# EAGLE board xr_vco_components_initial (EAGLE 7.3.0)
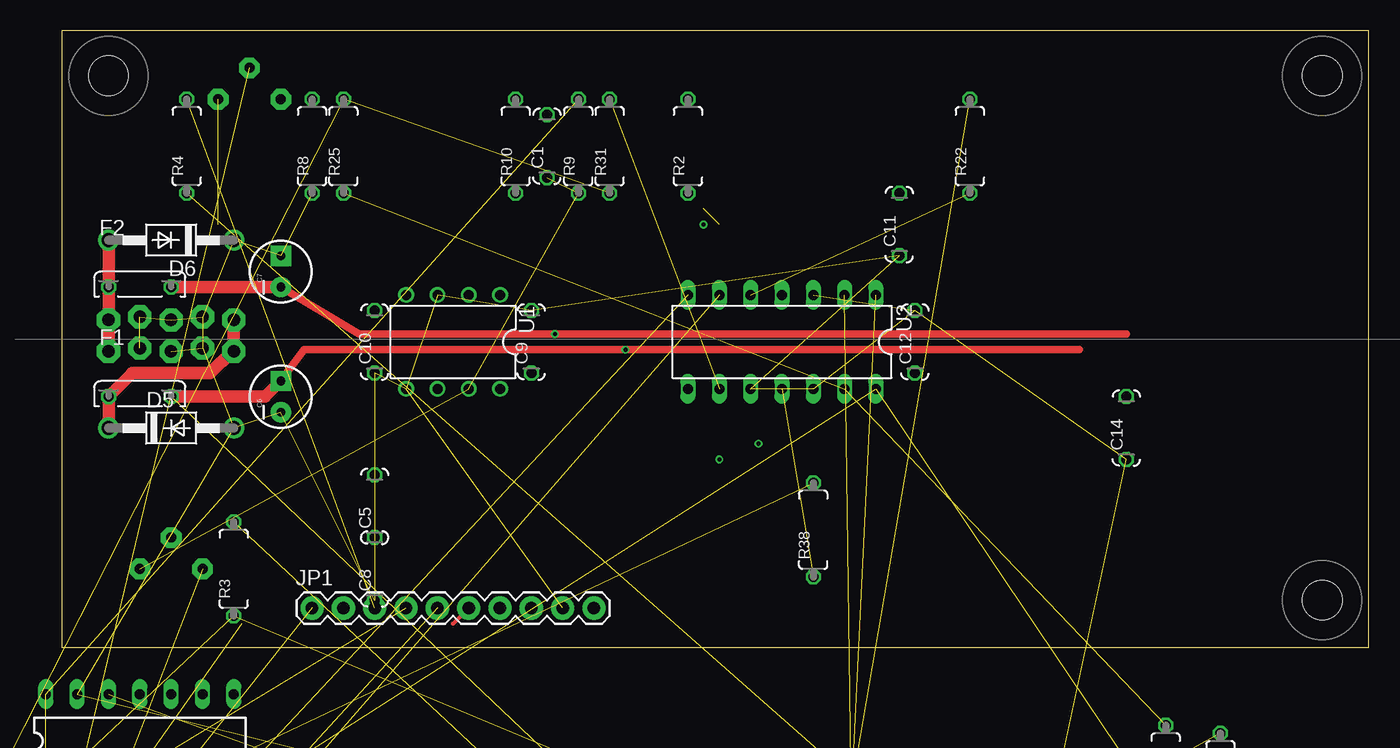
[diagram p0: board, top side]
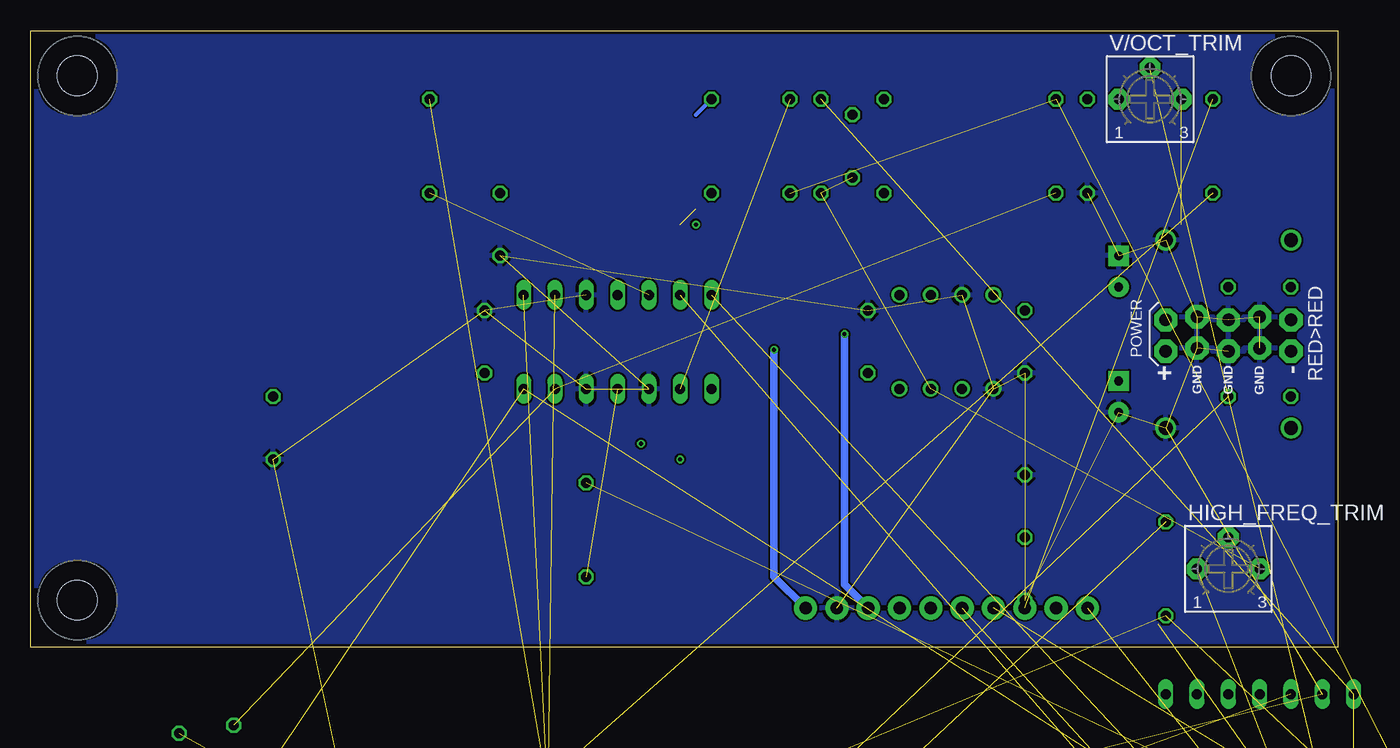
[diagram p1: board, bottom side, seen from below]

Size 106 x 50 mm. Coordinates in mm from the lower left corner, seen from the top.
Outline: 0,0 106,0 106,50 0,50 0,0
Copper layers (1*2*15*16): Top 0.035mm / dielectric 0.2mm / Route2 0.0175mm / dielectric 1.1mm / Route15 0.0175mm / dielectric 0.2mm / Bottom 0.035mm
Design rules "SeeedStudio_DRU_no_angle_20130527": minimum track width 6mil, minimum drill 12mil, track to track 6mil, track to pad 6mil, pad to pad 6mil, via to via 6mil, smd to smd 0mil, copper to edge 10mil, drill to drill 10mil, minimum pad ring 6mil, minimum via ring 6mil, stop-mask expansion 2mil, vias tented up to drill 25mil, thermal gap 10mil
Net classes: 1 power: width 0.406 mm; 2 ground: width 0.305 mm

## Footprints (pad centres in the part's own frame; a part is rotated, then mirrored left to right if it is on the bottom)
C050-024X044 = drill 0.813 octagon: 1 -2.54,0; 2 2.54,0
CPOL-RADIAL-10UF-25V = drill 0.7 pad 1.651 square: 1 1.27,0 | drill 0.7 pad 1.651: 2 -1.27,0
DO35-7 = drill 0.813: A 3.81,0 | drill 0.813 square: C -3.81,0
DO41-10 = drill 1.118: A 5.08,0; C -5.08,0
C050H075X075 = drill 0.813 octagon: 1 -2.54,0; 2 2.54,0
BOURNS_3362P_TRIMMER = drill 0.813 pad 1.676 octagon: 1 -2.54,0; 2 0,2.54; 3 2.54,0
DIL16 = drill 0.813 long: 1 -8.89,-3.81; 2 -6.35,-3.81; 3 -3.81,-3.81; 4 -1.27,-3.81; 5 1.27,-3.81; 6 3.81,-3.81; 7 6.35,-3.81; 8 8.89,-3.81; 9 8.89,3.81; 10 6.35,3.81; 11 3.81,3.81; 12 1.27,3.81; 13 -1.27,3.81; 14 -3.81,3.81; 15 -6.35,3.81; 16 -8.89,3.81
1X10 = drill 1.016 pad 1.88: 1 0,0; 2 2.54,0; 3 5.08,0; 4 7.62,0; 5 10.16,0; 6 12.7,0; 7 15.24,0; 8 17.78,0; 9 20.32,0; 10 22.86,0
DIL14 = drill 0.813 long: 1 -7.62,-3.81; 2 -5.08,-3.81; 3 -2.54,-3.81; 4 0,-3.81; 5 2.54,-3.81; 6 5.08,-3.81; 7 7.62,-3.81; 8 7.62,3.81; 9 5.08,3.81; 10 2.54,3.81; 11 0,3.81; 12 -2.54,3.81; 13 -5.08,3.81; 14 -7.62,3.81
TO92D = drill 0.813 octagon: B 0,1.905; C 1.27,0; E -1.27,0
7MM_RESISTOR = drill 0.813 octagon: 1 -3.81,0; 2 3.81,0
108-2AD1T2224-EVX = drill 1.092 square: 1 -1.27,-2.54; 2 -1.27,0; 3 -1.27,2.54; 4 1.27,-2.54; 5 1.27,0; 6 1.27,2.54
EURO_PWR_HEADER_LOCK = drill 1.016 pad 1.88 octagon: GND1 -2.54,1.143; GND2 -2.54,-1.397; GND3 0,1.397; GND4 0,-1.143; GND5 2.54,1.143; GND6 2.54,-1.397; NEG1 -5.08,1.397; NEG2 -5.08,-1.143; POS1 5.08,1.397; POS2 5.08,-1.143
DIL08 = drill 0.813 pad 1.27: 1 -3.81,-3.81; 2 -1.27,-3.81; 3 1.27,-3.81; 4 3.81,-3.81; 5 3.81,3.81; 6 1.27,3.81; 7 -1.27,3.81; 8 -3.81,3.81
MOUNTING_HOLE = hole 3.2: 0,0

## Placement (x,y rotation side)
C1  100pf  [C050-024X044]  39.37,40.64 90 top
C2  10uf  [CPOL-RADIAL-10UF-25V]  -25.4,-39.37 0 top  (outside the outline)
C5  100n  [C050-024X044]  25.4,11.43 90 top
C6  10uf  [CPOL-RADIAL-10UF-25V]  17.78,20.32 90 top
C7  10uf  [CPOL-RADIAL-10UF-25V]  17.78,30.48 90 top
C8  100n  [C050-024X044]  25.4,6.35 90 top
C9  100n  [C050-024X044]  38.1,24.77 90 top
C10  100n  [C050-024X044]  25.4,24.77 90 top
C11  100n  [C050-024X044]  67.94,34.29 90 top
C12  100n  [C050-024X044]  69.22,24.77 90 top
C13  100n  [C050-024X044]  74.93,-13.97 90 top  (outside the outline)
C14  100n  [C050-024X044]  86.36,17.78 90 top
C15  470pf  [C050-024X044]  -40.64,-80.01 0 top  (outside the outline)
C16  0.047uf  [C050-024X044]  -40.64,-87 0 top  (outside the outline)
C17  4.7uf  [CPOL-RADIAL-10UF-25V]  -47.62,-83.82 0 top  (outside the outline)
C18  4.7uf  [CPOL-RADIAL-10UF-25V]  -53.34,-83.82 0 top  (outside the outline)
D1  1N4148  [DO35-7]  -39.37,-48.9 0 top  (outside the outline)
D2  1N4148  [DO35-7]  1.27,-26.67 0 top  (outside the outline)
D3  1N4148  [DO35-7]  -39.37,-51.44 0 top  (outside the outline)
D4  1N4148  [DO35-7]  -39.37,-76.83 0 top  (outside the outline)
D5  1N4001  [DO41-10]  8.89,17.78 0 top
D6  1N4001  [DO41-10]  8.89,33.02 180 top
D7  1N4148  [DO35-7]  -50.8,-90.17 0 top  (outside the outline)
D8  1N4148  [DO35-7]  -50.8,-92.71 0 top  (outside the outline)
F1  FUSE  [C050H075X075]  6.35,20.32 0 top
F2  FUSE  [C050H075X075]  6.35,29.21 0 top
HIGH_FREQ_TRIM  1M  [BOURNS_3362P_TRIMMER]  8.89,6.35 0 bottom
IC2  [DIL16]  59.05,-22.23 0 top  (outside the outline)
JP1  M10"  [1X10]  20.32,3.17 0 top
OFFSET_TRIM  50k  [BOURNS_3362P_TRIMMER]  -18.41,-25.4 0 top  (outside the outline)
Q1  THAT300P  [DIL14]  6.35,-7.62 0 top  (outside the outline)
Q3  2N3904  [TO92D]  80.64,-12.7 270 top  (outside the outline)
R1  47k  [7MM_RESISTOR]  1.27,-29.84 0 top  (outside the outline)
R2  2k  [7MM_RESISTOR]  50.8,40.64 90 top
R3  82k  [7MM_RESISTOR]  13.97,6.35 90 top
R4  1k  [7MM_RESISTOR]  10.16,40.64 90 top
R5  11k  [7MM_RESISTOR]  -17.14,-33.02 0 top  (outside the outline)
R6  20k  [7MM_RESISTOR]  -17.14,-36.2 0 top  (outside the outline)
R7  5.6k  [7MM_RESISTOR]  -17.14,-39.37 0 top  (outside the outline)
R8  390R  [7MM_RESISTOR]  20.32,40.64 90 top
R9  4.7k  [7MM_RESISTOR]  41.91,40.64 90 top
R10  1.2m  [7MM_RESISTOR]  36.83,40.64 90 top
R11  5.6k  [7MM_RESISTOR]  -17.14,-42.55 0 top  (outside the outline)
R12  1k  [7MM_RESISTOR]  -39.37,-45.72 0 top  (outside the outline)
R13  4.7k  [7MM_RESISTOR]  -39.37,-54.61 0 top  (outside the outline)
R14  10k  [7MM_RESISTOR]  -39.37,-57.78 0 top  (outside the outline)
R15  2.2M  [7MM_RESISTOR]  -39.37,-60.96 0 top  (outside the outline)
R16  3k  [7MM_RESISTOR]  -39.37,-64.14 0 top  (outside the outline)
R17  1.8k  [7MM_RESISTOR]  -39.37,-67.31 0 top  (outside the outline)
R18  10k  [7MM_RESISTOR]  -39.37,-70.48 0 top  (outside the outline)
R19  10k  [7MM_RESISTOR]  89.53,-10.16 90 top  (outside the outline)
R20  100k  [7MM_RESISTOR]  93.98,-10.79 90 top  (outside the outline)
R22  2.2k  [7MM_RESISTOR]  73.66,40.64 90 top
R23  10k  [7MM_RESISTOR]  -39.37,-73.66 0 top  (outside the outline)
R25  18k  [7MM_RESISTOR]  22.86,40.64 90 top
R26  4.7k  [7MM_RESISTOR]  -39.37,-83.82 0 top  (outside the outline)
R31  2.2m  [7MM_RESISTOR]  44.45,40.64 90 top
R38  150k  [7MM_RESISTOR]  60.96,9.53 90 top
R39  200k  [7MM_RESISTOR]  64.14,-14.61 90 top  (outside the outline)
S1  108-2AD1T2224-EVX  [108-2AD1T2224-EVX]  -8.89,-25.4 0 top  (outside the outline)
SINE_ROUND_TRIM1  500 Ohm  [BOURNS_3362P_TRIMMER]  -32.38,-38.1 0 top  (outside the outline)
SINE_SYM  25k  [BOURNS_3362P_TRIMMER]  -40.64,-38.1 0 top  (outside the outline)
SV1  EURO_POWER_HEADERLOCK_PADS  [EURO_PWR_HEADER_LOCK]  8.89,25.4 180 bottom
U1  LF442N  [DIL08]  31.75,24.77 180 top
U2  TL074P  [DIL14]  58.42,24.77 180 top
U$2  [MOUNTING_HOLE]  3.81,46.35 0 top
U$3  [MOUNTING_HOLE]  102.23,46.35 0 top
U$4  [MOUNTING_HOLE]  102.23,3.81 0 top
V/OCT_TRIM  100R  [BOURNS_3362P_TRIMMER]  15.24,44.45 0 bottom

## Library data of the parts
C1 C5 C8-C16 F1 F2 = TomW
C2 C6 C7 C17 C18 = SparkFun-Passives
D1-D4 D7 D8 HIGH_FREQ_TRIM OFFSET_TRIM R1-R20 R22 R23 R25 R26 R31 R38 R39 SINE_ROUND_TRIM1 SINE_SYM SV1 U$2-U$4 V/OCT_TRIM = MusicThingModular
D5 D6 = diode
IC2 = exar; OC_FARNELL: unknown; OC_NEWARK: unknown
JP1 = SparkFun-Connectors
Q1 = that-corp
Q3 = transistor-small-signal
S1 = switch-mountain
U1 U2 = linear

## Nets
+12V: C6.1 C17.1 F1.2 IC2.4 JP1.10 R7.2 R13.2 R18.2 R26.1
+12V_INLET [power]: D5.C F1.1 SV1.POS1 SV1.POS2
-12V: C7.2 F2.2 JP1.8
-12V_INLET [power]: D6.A F2.1 SV1.NEG1 SV1.NEG2
CATH_D4: D1.C R19.1 U2.14
GND: C2.2 C5.2 C6.2 C7.1 C8.1 C9.2 C10.1 C11.1 C12.2 C13.2 C14.1 C17.2 C18.2 D3.A D4.A D5.A D6.C IC2.12 JP1.9 Q1.13 Q3.E R8.1 R11.1 R12.1 R17.1 R23.1 SINE_SYM.2 SV1.GND1 SV1.GND2 SV1.GND3 SV1.GND4 SV1.GND5 SV1.GND6 U1.3 U1.5 U2.3 U2.10 U2.12
N$1: IC2.7 Q1.12
N$2: D2.C R1.2
N$3: HIGH_FREQ_TRIM.1 R1.1
N$4: R5.1 S1.3
N$5: IC2.2 R3.2
N$6: R6.1 S1.1
N$7: R2.2
N$8: OFFSET_TRIM.3 R3.1 R39.1 U2.2
N$10: D2.A Q1.2 V/OCT_TRIM.2
N$11: Q1.1 Q1.14 R9.2
N$12: OFFSET_TRIM.1 R38.2
N$13: R4.1 R39.2 U2.1
N$14: S1.4 SINE_ROUND_TRIM1.3
N$15: C1.1 HIGH_FREQ_TRIM.3 R9.1 U1.7
N$16: C2.1 R5.2 R6.2 R7.1 R11.2
N$17: IC2.16 SINE_SYM.1
N$18: IC2.3 S1.2
N$19: IC2.14 S1.5
N$20: IC2.13 SINE_ROUND_TRIM1.1
N$21: IC2.15 SINE_SYM.3
N$22: IC2.8 R12.2
N$23: R18.1 R23.2 U2.6
N$24: R15.1 R16.2 U2.7
N$25: R19.2 R25.1 U2.13
N$26: R22.1 U2.5
N$27: D1.A D3.C IC2.1 R14.1
N$28: C15.2 R20.2
N$29: D4.C Q3.B R20.1
N$30: IC2.11 R13.1 R14.2 R22.2
N$31: IC2.9 Q3.C R26.2
N$32: C16.2 IC2.6
N$33: C16.1 IC2.5
N$34: C18.1
N$35: D7.A D8.C
N$36: D8.A R25.2 R31.1
S$1: R38.1 U2.11
S$2: JP1.4 Q1.3
S$3: JP1.6
S$4: R31.2 U2.9
S$10: V/OCT_TRIM.3
SINE_TRI_OUT: JP1.3 R4.2
SKEW_IN: D7.C JP1.5
SQR_OUT: JP1.1 R16.1 R17.2
SYNC_IN: C15.1

## Tracks (layer width: path | path; a pad name or v marks a point on that pad's centre or on a via)
+12V  (via drill 0.33)  (6 unrouted)
  Top 0.61: C6.1 19.68,24.13 v45.72,24.13 82.55,24.13
  Top 1.016: F1.2 16.51,20.32 C6.1
  Bottom 0.61: JP1.10 45.72,5.71 v45.72,24.13
+12V_INLET
  Top 1.016: SV1.POS2 SV1.POS1 13.84,24 12.06,22.23 5.71,22.23 F1.1 D5.C
-12V  (via drill 0.33)
  Top 0.61: C7.2 24.13,25.4 v40.01,25.4 86.36,25.4
  Top 1.016: F2.2 C7.2
  Bottom 0.61: JP1.8 40.01,5.08 v40.01,25.4
-12V_INLET
  Top 1.016: D6.A F2.1 SV1.NEG2 SV1.NEG1
CATH_D4  (2 unrouted)
GND  (37 unrouted)
  pour Bottom: -3.81,-1.27 107.95,-1.27 107.95,54.61 -3.81,54.61
N$1  (1 unrouted)
N$2  (1 unrouted)
N$3  (1 unrouted)
N$4  (1 unrouted)
N$5  (1 unrouted)
N$6  (1 unrouted)
N$7
  Bottom 0.305: R2.2 52.07,43.18
N$8  (3 unrouted)
N$10  (2 unrouted)
N$11  (2 unrouted)
N$12  (1 unrouted)
N$13  (2 unrouted)
N$14  (1 unrouted)
N$15  (3 unrouted)
N$16  (4 unrouted)
N$17  (1 unrouted)
N$18  (1 unrouted)
N$19  (1 unrouted)
N$20  (1 unrouted)
N$21  (1 unrouted)
N$22  (1 unrouted)
N$23  (2 unrouted)
N$24  (2 unrouted)
N$25  (2 unrouted)
N$26  (1 unrouted)
N$27  (3 unrouted)
N$28  (1 unrouted)
N$29  (2 unrouted)
N$30  (3 unrouted)
N$31  (2 unrouted)
N$32  (1 unrouted)
N$33  (1 unrouted)
N$35  (1 unrouted)
N$36  (2 unrouted)
S$1  (1 unrouted)
S$2  (1 unrouted)
S$3
  Top 0.305: 31.75,1.91 JP1.6
S$4  (1 unrouted)
S$8  (via drill 0.33)
  other vias: 56.52,16.51
S$9  (via drill 0.33)
  other vias: 53.34,15.24
S$10  (1 unrouted)
S$11  (via drill 0.33)
  other vias: 52.07,34.29
S$12  (1 unrouted)
SINE_TRI_OUT  (1 unrouted)
SKEW_IN  (1 unrouted)
SQR_OUT  (2 unrouted)
SYNC_IN  (1 unrouted)